# Altium PCB SupplyBoard.PcbDoc
Units mm, origin at the board's own origin, x right, y up, seen from the top; angles counter-clockwise.
Board outline 44.31 x 44.31 mm, 2 copper layers (Top Layer, Bottom Layer), stack 1.571 mm thick; 38 components, 16 nets, 142 pads, 59 vias.
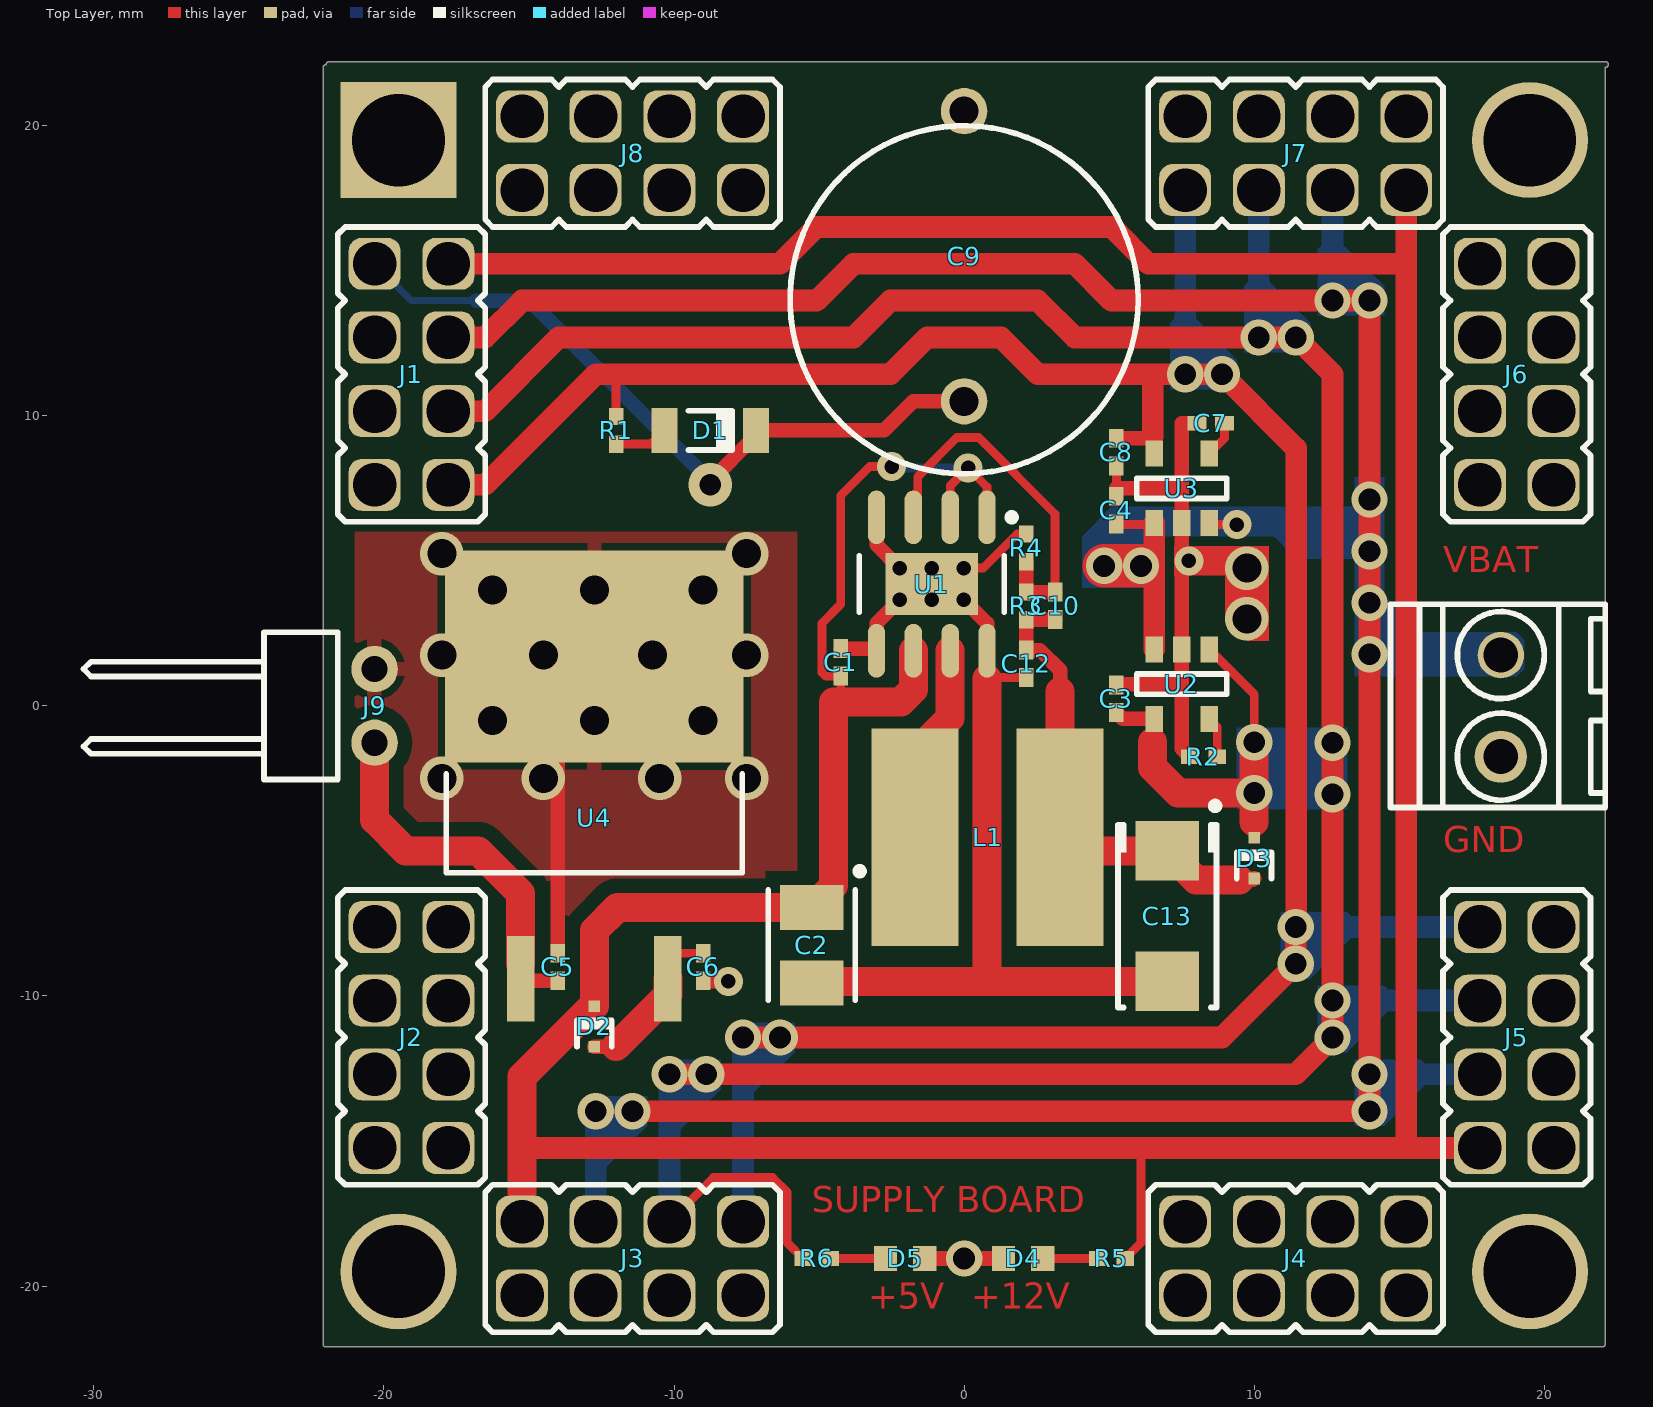
[diagram p0: Top Layer view]
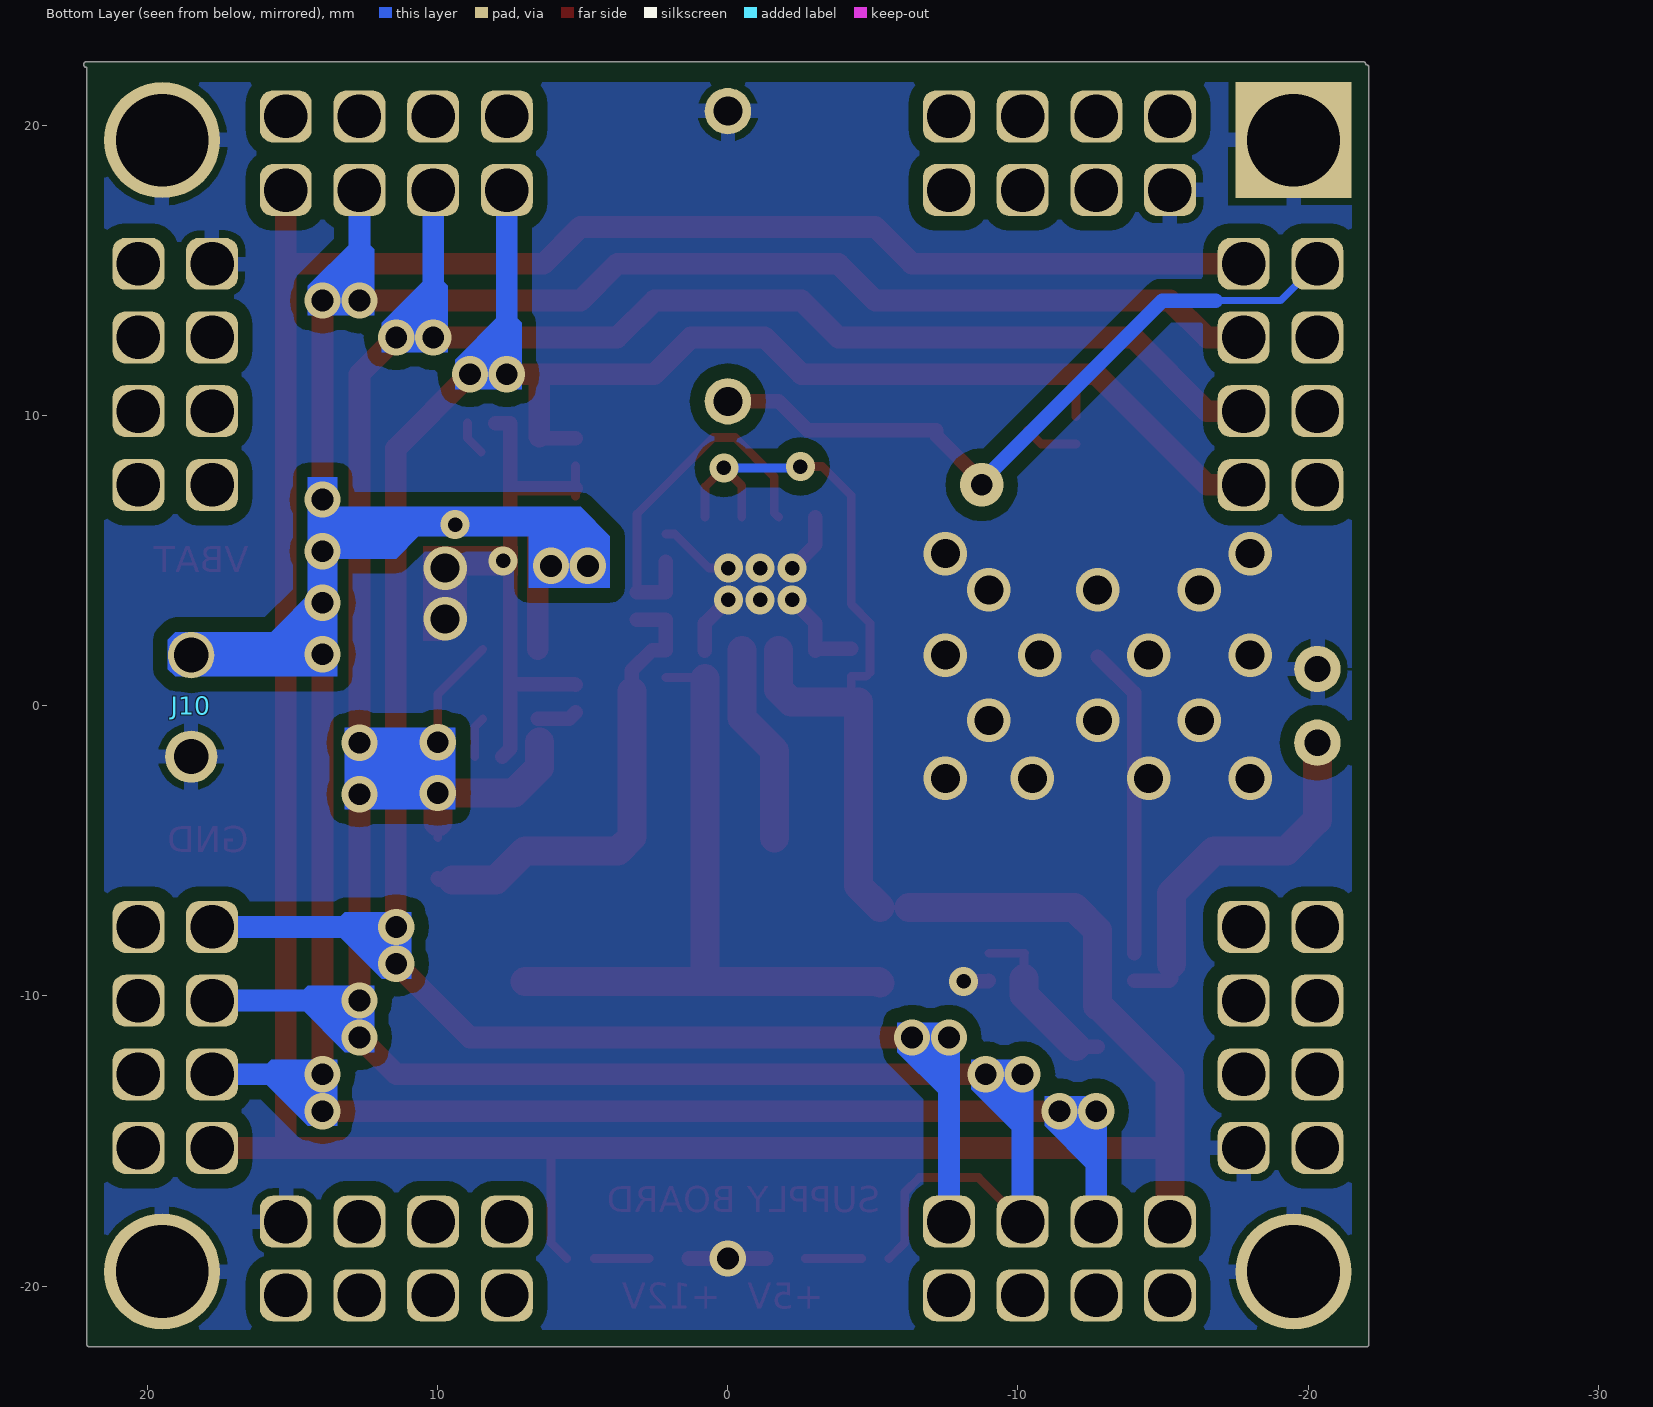
[diagram p1: Bottom Layer view, seen from below]

## Layer stack, top to bottom
Top Solder: solder mask 0.0102, Solder Resist, Dk 3.5
Top Layer: signal copper 0.0356
Dielectric 1: dielectric 1.5, FR-4, Dk 4.8
Bottom Layer: signal copper 0.0356
Bottom Solder: solder mask 0.0102, Solder Resist, Dk 3.5

## Board outline
-22.1,-22 -22.1,22 cw(c-22,22) -21.991,22.1 cw(c-21.891,22.109) -21.891,22.209 22.109,22.209 cw(c22.109,22.109) 22.209,22.109 cw(c22.109,22.109) 22.109,22.008 22.1,22.008 cw(c22,22) 22.1,22 22.1,-22 cw(c22,-22) 22,-22.1 -22,-22.1 cw(c-22,-22)

## Design rules (kind name [scope] priority, off if disabled: settings)
Clearance Clearance_Track(GND)_Polygon(GND) [IsTrack and InNet('GND') vs InPolygon and InNet('GND')] p1: gap=0
Clearance Clearance_Track(VCC)_Polygon(VCC) [IsTrack and InNet('VCC') vs InPolygon and InNet('VCC')] p2: gap=0
Clearance Clearance_Track(VBAT)_Polygon(VBAT) [IsTrack and InNet('VBAT') vs InPolygon and InNet('VBAT')] p3: gap=0
Clearance Clearance_Polygon(VCC) [InPolygon and InNet('VCC')] p4: gap=1
Clearance Clearance_Polygon(GND) [InPolygon and InNet('GND')] p5: gap=0.5
Clearance [All] p6: gap=0.25
HoleSize [All] p1: absolutevalues=TRUE maxlimit=4 minlimit=0.3 maxpercent=80.000 minpercent=20.000
PolygonConnect PolygonConnect_Via(VCC) [InNet('VCC')] p1: connectstyle=Direct reliefconductorwidth=0.254 reliefentries=4 polygonreliefangle="90 Angle" airgapwidth=0.254
PolygonConnect PolygonConnect_Via(GND) [InNet('GND') vs IsVia] p2: connectstyle=Direct reliefconductorwidth=0.254 reliefentries=4 polygonreliefangle="90 Angle" airgapwidth=0.254
PolygonConnect [All] p3: connectstyle=Relief reliefconductorwidth=0.5 reliefentries=4 polygonreliefangle="90 Angle" airgapwidth=0.25
RoutingVias [All] p1: holewidth=0.5 width=1 viastyle="Through Hole" minholewidth=0.5 minwidth=1 maxholewidth=1.5 maxwidth=2
ShortCircuit ShortCircuit_Text_Polygon(GND) [InPolygon and InNet('GND') vs IsText] p1: allowed=TRUE
ShortCircuit [All] p2: allowed=FALSE
SilkToSilkClearance [All] p1: silktosilkclearance=0
SolderMaskExpansion [All] p1: expansion=0.102
Width [All] p1: maxlimit=2 minlimit=0.25 preferedwidth=0.3
26 further rules are at their usual default settings.

## Components (designator, comment, footprint, x,y, rotation, side; value= is the part's Value field where it differs from the comment)
C1 "0.1/25" CAP0402 -4.25,1.5 r270 top
C2 "100.0/16" SMB -5.25,-8.25 r270 top
C3 "0.1/25" CAP0402 5.25,0.25 r270 top
C4 "0.1/25" CAP0402 5.25,6.75 r270 top
C5 "0.1/25" CAP0402 -14,-9 r270 top
C6 "0.1/25" CAP0402 -9,-9 r90 top
C7 "0.1/25" CAP0402 8.5,9.75 r0 top
C8 "0.1/25" CAP0402 5.25,8.75 r90 top
C9 "0.1/5.5" EDLC1205H 0,14 r0 top
C10 "4.7p/25" CAP0402 3.135,3.45 r270 top
C12 "0.1/25" CAP0402 2.135,1.45 r90 top
C13 "220.0/6.3" SMC 7,-7.25 r270 top
D1 "LL4148" SOD80 -8.75,9.5 r180 top
D2 "PMEG2010EJ" SOD523 -12.75,-11.05 r270 top
D3 "PMEG2010EJ" SOD523 10,-5.25 r270 top
D4 "L-C191" LED0603 2.032,-19.05 r0 top
D5 "L-C191" LED0603 -2.032,-19.05 r180 top
J1 "LEFT" PBDM-8 -19.05,11.43 r270 top
J2 "LEFT" PBDM-8 -19.05,-11.43 r270 top
J3 "BOTTOM" PBDM-8 -11.43,-19.05 r0 top
J4 "BOTTOM" PBDM-8 11.43,-19.05 r0 top
J5 "RIGHT" PBDM-8 19.05,-11.43 r90 top
J6 "RIGHT" PBDM-8 19.05,11.43 r90 top
J7 "TOP" PBDM-8 11.43,19.05 r180 top
J8 "TOP" PBDM-8 -11.43,19.05 r180 top
J9 "PLS-2R" PLS-2R -20.32,0 r270 top
J10 "DG-381-3.5(2)" DG-381-3.5(2) 18.5,0 r270 bottom
L1 "10u" SND0705 -1.69,-4.525 r90 top
R1 "5.1k" RES0402 -12,9.5 r90 top
R2 "2k" RES0402 8.25,-1.75 r0 top
R3 "9.1k" RES0402 2.135,3.45 r270 top
R4 "2k" RES0402 2.135,5.45 r270 top
R5 "1k" RES0402 5.08,-19.05 r0 top
R6 "1k" RES0402 -5.08,-19.05 r180 top
U1 "ST1S10" PowerSO8 -1.115,4.2 r270 top
U2 "MCP73812T" SOT23-5 7.5,0.75 r270 top
U3 "LP2985-3.3" SOT23-5 7.5,7.5 r90 top
U4 "7812D2T" D2PAK-3 -12.75,-2.75 r90 top

## Footprints (in the part's own frame and the unit in brackets; to place one, negate y for a bottom-side part, rotate by r counter-clockwise, add the part's x,y. Pads: shape width x height; smd on the part's side, far side on the other; paste and mask are expansions set on the pad)
CAP0402 [mm]
  rect 0.65x0.5 smd: 1(-0.475,0) 2(0.475,0)
  body extent -0.55,-0.3 0.55,0.3, height 0.5
D2PAK-3 [mm]
  rect 2.95x0.95 smd: 1(-6.65,2.54) 3(-6.65,-2.54)
  rect 7.3x10.3 smd: 2(4.45,0)
  silkscreen extent -3,-5.1 0.4,5.1, body extent -7.7,-5.25 7.65,5.25, height 4.9
DG-381-3.5(2) [mm] "2-pin connector with screws, pitch 3.5 mm"
  round 1.6 hole 1.2: 1(-1.75,0)
  round 1.8 hole 1.2: 2(1.75,0)
  body extent -3.5,-3.6 4,3.8, height 8.6
EDLC1205H [mm]
  round 1.6 hole 1: 1(0,6.5) 2(0,-3.5)
  silkscreen extent -6,-6 6,6, body extent -6,-6 6,6.4, height 6.6
LED0603 [mm]
  rect 0.8x0.85 smd: 1(-0.675,0) 2(0.675,0)
  body extent -0.8,-0.4 0.8,0.4, height 0.59
PBDM-8 [mm] "5-pin interboard connector, pitch 2.54 mm"
  rrect50% 1.79x1.79 hole 1.5: 1(-3.81,-1.27) 2(-3.81,1.27) 3(-1.27,-1.27) 4(-1.27,1.27) 5(1.27,-1.27) 6(1.27,1.27) 7(3.81,-1.27) 8(3.81,1.27)
  silkscreen extent -5.08,-2.54 5.08,2.54, body extent -5.08,-2.54 5.08,2.54, height 3
PLS-2R [mm] "2-pin angle interboard connector, pitch 2.54 mm"
  round 1.6 hole 0.9: 1(-1.27,0) 2(1.27,0)
  silkscreen extent -2.54,-10.03 2.54,-1.27, body extent -2.54,-9.91 2.54,0.31, height 2.44
PowerSO8 [mm] "Plastic SOIC, 8-pin with exposed pad"
  oval 1.85x0.6 smd: 1(-2.3,1.905) 2(-2.3,0.635) 3(-2.3,-0.635) 4(-2.3,-1.905) 5(2.3,-1.905) 6(2.3,-0.635) 7(2.3,0.635) 8(2.3,1.905)
  rect 2.15x3.2 smd: 9(0,0)
  silkscreen extent -2.42,-2.5 0.97,2.88, body extent -3,-2.54 3,2.54, height 1.7
RES0402 [mm]
  rect 0.6x0.5 smd: 1(-0.475,0) 2(0.475,0)
  body extent -0.53,-0.28 0.53,0.28, height 0.35
SMB [mm] "Surface mount package, size B"
  rect 1.55x2.2 smd: 1(1.3,0) 2(-1.3,0)
  silkscreen extent -2.67,-1.5 1.9,1.78, body extent -1.75,-1.4 1.75,1.4, height 2.1
SMC [mm] "Surface mount package, size C"
  rect 2.05x2.2 smd: 1(2.25,0) 2(-2.25,0)
  silkscreen extent -3.92,-1.7 3.15,1.78, body extent -3,-1.6 3,1.6, height 2.8
SND0705 [mm] "SMD Inductor 7.8x7x5 mm"
  rect 7.5x3 smd: 1(0,0) 2(0,-5)
  body extent -3.5,-6.4 3.5,1.4, height 5
SOD80 [mm]
  rect 0.9x1.55 smd: 1(-1.575,0) 2(1.575,0)
  silkscreen extent -0.75,-0.67 0.75,0.68, body extent -1.85,-0.8 1.85,0.8, height 1.61
SOD523 [mm]
  rect 0.4x0.4 smd: 1(-0.7,0) 2(0.7,0)
  silkscreen extent -0.2,-0.6 0.7,0.6, body extent -0.7,-0.6 0.7,0.6, height 0.6
SOT23-5 [mm] "SOT23, 5-Leads, Body 2,90x2,70mm, Pitch 0,95mm, IPC High Density"
  rect 0.9x0.6 smd: 1(-1.2,0.95) 2(-1.2,0) 3(-1.2,-0.95) 4(1.2,-0.95) 5(1.2,0.95)
  silkscreen extent -0.35,-1.55 0.35,1.55, body extent -1.43,-1.5 1.41,1.5, height 1.1

## Part data
C1 C3 C4 C5 C6 C7 C8 C10 C12: library part CAP0402, "Ceramic chip capacitor 0402"
C2: library part TAJB, "Standard tantalum SMT capacitor, size B"
C9: library part EDLC1205H, "Electric double layer capacitor"
C13: library part TAJC, "Standard tantalum SMT capacitor, size C"
D1: "Small Signal Diode"
D2 D3: "1 A very low VF MEGA Schottky barrier rectifiers"
D4 D5: "SMD LED, size 0603"
J1 J2 J3 J4 J5 J6 J7 J8: library part PBDM-8, "2x4-pin header, pitch 2.54 mm"
J9: "2-pin angle header, pitch 2.54 mm"
J10: "2-pin connector with screws, pitch 3.5 mm"
L1: library part SND0705, "Power inductor"
R1 R2 R3 R4 R5 R6: library part RES0402, "Ceramic chip resistor"
U1: "DC-DC buck converter"
U2: "Li-Ion/Li-Po battery charge management controller"
U3: "Micropower 150 mA Low-Noise Ultra Low-Dropout Regulator"
U4: "1.0 A Positive Voltage Regulator"

## Free pads (board coordinates)
  round 4 hole 3.2: 0(-19.5,-19.5) 0(19.5,-19.5) 0(19.5,19.5)
  rect 4x4 hole 3.2: 0(-19.5,19.5)

## Via types
v1: diameter 1.25, hole 0.75, Top Layer to Bottom Layer, 29 vias
v2: diameter 1.5, hole 1, Top Layer to Bottom Layer, 18 vias
v3: diameter 1, hole 0.5, Top Layer to Bottom Layer, 11 vias
v4: diameter 1.5, hole 0.75, Top Layer to Bottom Layer, 1 vias

## Nets (pads, with @x,y where several pads share a name; then routed paths per layer and width w, separated by ;. In a path a pad name is that pad's centre, name@x,y a point inside that pad or via, vN(x,y) a via of type N, cw(c..) or ccw(c..) an arc to the next point about the centre after c; other vN are vias at no path point)
+5V: C3.2 D3.1 J1.6 J3.6 J5.6 J7.6 R6.2 U2.1 U2.4 | length 115.2
  Top Layer w0.3: J3.6 -8.636,-16.256 -6.604,-16.256 -6.096,-16.764 -6.096,-18.509 R6.2 ; U2.1 10,0.4 v1@10,-1.364 ; D3.1 10,-4
  Top Layer w0.5: C3.2 5.475,-0.45 U2.4
  Top Layer w0.75: J1.6 -16.51,10.16 -13.97,12.7 -3.81,12.7 -2.54,13.97 2.54,13.97 3.81,12.7 v1(10.16,12.7) v1(11.43,12.7) 12.7,11.43 v1(12.7,-1.27) v1(12.7,-3.048) v1(12.7,-10.16) v1(12.7,-11.43) 11.43,-12.7 v1(-8.89,-12.7) v1(-10.16,-12.7)
  Top Layer w1: 6.5,-1.25 6.5,-2.125 7.375,-3 v1@9.886,-3 ; 10,-4 v1(10,-3) v1@10,-1.364
  Bottom Layer w0.75: J3.6 v1(-10.16,-12.7) ; v1(10.16,12.7) J7.6 ; v1(12.7,-10.16) J5.6
  other v1: 10,-1.25
+12V: C1.2 C2.2 D2.1 J1.2 J3.2 J5.2 J7.2 R5.2 U1.1 U1.2 U1.6 | length 150.5
  Top Layer w0.3: -4.5,0.14 -4.25,0.39 C1.2 -4.775,1.025 -4.9,1.15 -4.9,2.85 -4.25,3.5 -4.25,7.25 -3.25,8.25 v3(-2.5,8.25) ; U1.2 -0.48,7.585 v3(0.135,8.2) 0.79,7.545 U1.1 ; R5.2 6.096,-18.509 6.096,-15.24
  Top Layer w0.75: J1.2 -6.35,15.24 -5.08,16.51 5.08,16.51 6.35,15.24 15.24,15.24 ; -15.24,-15.24 6.096,-15.24 15.24,-15.24 ; J7.2 15.24,15.24 ; J5.2 15.24,-15.24 ; 15.24,-15.24 15.24,15.24
  Top Layer w1: J3.2 -15.24,-15.24 -15.24,-12.779 -12.811,-10.35 D2.1 -12.75,-7.75 -11.95,-6.95 C2.2@-6.25,-6.95 ; C2.2 -4.5,-6.2 -4.5,0.14 -2.175,0.14 -1.75,0.565 U1.6
  Bottom Layer w0.3: v3(-2.5,8.25) -2.45,8.2 v3(0.135,8.2)
+15V: C5.2 J9.2 U4.1 | length 12.5
  Top Layer w0.5: U4.1 -15.215,-9.475 C5.2
  Top Layer w1: J9.2 -20.32,-3.93 -19.25,-5 -16.75,-5 -15.29,-6.46 U4.1@-15.29,-8.9
GND: C1.1 C2.1 C3.1 C4.1 C5.1 C6.1 C7.1 C8.1 C9.1 C12.1 C13.1 D4.1 D5.1 J2.8 J4.8 J6.8 J8.8 J9.1 J10.2 pad.0 R2.1 R4.1 U1.4 U1.5 U1.8 U1.9 U2.2 U3.2 U4.2 | length 66.5
  Top Layer w0.3: v3(-0.015,4.75) 0.655,4.75 1.83,5.925 R4.1 ; 0.79,0.95 0.815,0.975 C12.1 ; C4.1 5.25,7.5 C8.1
  Top Layer w0.5: C5.1 -14,0.45 U4.2 ; C6.1 -8.975,-9.5 v3(-8.125,-9.5) ; C1.1 -3.095,1.975 U1.5 -3.02,2.845 v3(-2.215,3.65) ; U1.4 -3.02,5.555 v3(-2.215,4.75) ; D5.1@-1.325,-19.05 v1(0,-19.05) D4.1 ; v3(-0.015,3.65) 0.79,2.845 U1.8 ; C3.1 5.275,0.75 7.5,0.75 ; C4.1@5.25,7.5 7.5,7.5 ; R2.1 7.5,-1.475 7.5,0.75 ; C7.1 7.5,9.75 7.5,7.5 ; 8.5,5 8.75,5 ; 7.5,0.75 U2.2 U3.2 7.5,7.5
  Top Layer w1: C2.1 -5.2,-9.5 0.79,-9.5 ; 0.79,0.95 0.79,-9.5 ; C13.1 0.79,-9.5
  other v2: -18,-2.5 -14.5,-2.5 -10.5,-2.5 -7.5,-2.5 -16.25,-0.5 -12.75,-0.5 -9,-0.5 -18,1.75 -14.5,1.75 -10.75,1.75 -7.5,1.75 9.75,3 -16.25,4 -12.75,4 -9,4 9.75,4.75 -18,5.25 -7.5,5.25
  other v3: -1.115,3.65 -1.115,4.75 7.75,5
NetC6_2: C6.2 D2.2 U4.3 | length 5.9
  Top Layer w0.3: U4.3@-10.225,-8.525 C6.2 ; U4.3 U4.3@-10.21,-8.54
  Top Layer w0.5: D2.2 -12,-11.75
  Top Layer w1: -12,-11.75 -10.21,-9.96 U4.3
NetC7_2: C7.2 U3.4 | length 1.2
  Top Layer w0.3: U3.4@8.5,8.75 8.975,9.225 C7.2
NetC10_1: C10.1 R3.1 R4.2 U1.3 | length 12.6
  Top Layer w0.3: U1.3 -1.6,6.65 -1.6,7.9 -0.25,9.25 0.5,9.25 3.135,6.615 C10.1
  Top Layer w0.5: R4.2 R3.1 C10.1
NetC10_2: C10.2 C12.2 C13.2 D3.2 L1.2 R3.2 | length 16.6
  Top Layer w0.5: C10.2 R3.2 C12.2 2.61,1.925 3.31,1.225 3.31,0.5 ; 9.5,-6 9.95,-6 D3.2
  Top Layer w1: 3.31,0.5 L1.2 3.785,-5 C13.2 8,-6 9.5,-6
NetD1_2: D1.2 R1.1 | length 1.9
  Top Layer w0.3: R1.1 -10.8,9.025 D1.2
NetD4_2: D4.2 R5.1 | length 1.9
  Top Layer w0.3: D4.2 R5.1
NetD5_2: D5.2 R6.1 | length 1.9
  Top Layer w0.3: R6.1 D5.2 D5.2@-2.675,-19.05
NetL1_1: L1.1 U1.7 | length 6.9
  Top Layer w1: L1.1@-1.615,-4.55 -1.615,-1.55 -0.48,-0.415 U1.7
NetR2_2: R2.2 U2.5 | length 1.4
  Top Layer w0.3: U2.5 8.725,-0.725 R2.2
VBAT: C4.2 J1.4 J3.4 J5.4 J7.4 J10.1 U2.3 U3.1 U3.3 | length 106
  Top Layer w0.3: C4.2@5.225,6.25 U3.1@6.5,6.25 ; U3.3 8.5,6.25 v3(9.4,6.25)
  Top Layer w0.75: J1.4 -16.51,12.7 -15.24,13.97 -5.08,13.97 -3.81,15.24 3.81,15.24 5.08,13.97 v1(12.7,13.97) v1(13.97,13.97) v1(13.97,-12.7) v1(13.97,-13.97) v1(-11.43,-13.97) ; U2.3 U3.1
  Top Layer w1.5: v1(4.826,4.826) v1(6.096,4.826)
  Bottom Layer w0.75: J3.4 v1(-12.7,-13.97) ; v1(12.7,13.97) J7.4 ; v1(13.97,-12.7) J5.4
  other v1: 13.97,1.778 13.97,3.556 13.97,5.334 13.97,7.112
VBKUP: C9.2 D1.1 J1.1 | length 24.9
  Top Layer w0.5: v4(-8.75,7.625) -8.75,7.75 -7.175,9.325 D1.1 -2.75,9.5 -1.75,10.5 C9.2
  Bottom Layer w0.25: J1.1 -19.05,13.97 -16.815,13.97
  Bottom Layer w0.5: -16.815,13.97 -14.97,13.97 -8.75,7.75 v4(-8.75,7.625)
VCC: C8.2 J1.8 J3.8 J5.8 J7.8 R1.2 U3.5 | length 94.8
  Top Layer w0.3: R1.2 -12,11.43
  Top Layer w0.5: C8.2 6.55,9.225 6.5,9.275
  Top Layer w0.75: J1.8 -16.51,7.62 -12.7,11.43 -12,11.43 -2.54,11.43 -1.27,12.7 1.27,12.7 2.54,11.43 6.5,11.43 ; v1(-7.62,-11.43) v1(-6.35,-11.43) 8.89,-11.43 v1(11.43,-8.89) v1(11.43,-7.62) 11.45,-7.6 11.45,8.87 v1(8.89,11.43) v1(7.62,11.43) 6.5,11.43 ; 6.5,9.275 6.5,11.43
  Bottom Layer w0.75: J3.8 v1(-7.62,-11.43) ; v1(7.62,11.43) J7.8 ; v1(11.43,-7.62) J5.8
pads on no net: J1.3 J1.5 J1.7 J2.1 J2.2 J2.3 J2.4 J2.5 J2.6 J2.7 J3.1 J3.3 J3.5 J3.7 J4.1 J4.2 J4.3 J4.4 J4.5 J4.6 J4.7 J5.1 J5.3 J5.5 J5.7 J6.1 J6.2 J6.3 J6.4 J6.5 J6.6 J6.7 J7.1 J7.3 J7.5 J7.7 J8.1 J8.2 J8.3 J8.4 J8.5 J8.6 J8.7

## Polygon pours and split planes (outlines as drawn)
GND on Top Layer "Top-GND" (solid, remove dead copper, pour order 4): -5.75,6 -5.75,-7.75 -20.538,-7.75 -21,-7.538 -21,6
GND on Bottom Layer "Bottom-GND" (solid, remove dead copper, pour order 6): -21.5,21.5 21.5,21.5 21.5,-21.5 -21.5,-21.5

## Other copper
Top Layer:
  region net GND: 7.25,5.5 10.5,5.5 10.5,2.25 9.75,2.25 9,3 9,4.5 7.25,4.5
  text "VBAT" at 16.51,4.318 h1.52
  text "GND" at 16.51,-5.334 h1.52
  text "SUPPLY BOARD" at -5.25,-17.75 h1.52
  text "+5V" at -3.302,-21.082 h1.52
  text "+12V" at 0.254,-21.082 h1.52
Bottom Layer:
  region net VBAT: 13.462,1.016 19.05,1.016 19.304,1.27 19.304,2.286 19.05,2.54 15.748,2.54 14.224,4.064 13.462,4.064
  region net VBAT: 14.478,6.858 14.478,5.08 11.43,5.08 10.668,5.842 6.858,5.842 6.858,4.064 4.064,4.064 4.064,5.842 5.08,6.858
  region net VBAT: 14.478,7.874 14.478,1.016 13.462,1.016 13.462,7.874
  region net +5V: 13.208,-0.762 13.208,-3.556 9.398,-3.556 9.398,-0.762
  region net VBAT: -12.954,-13.462 -10.922,-13.462 -10.922,-14.478 -12.446,-16.002 -12.954,-16.002
  region net +5V: -10.414,-12.192 -8.382,-12.192 -8.382,-13.208 -9.906,-14.732 -10.414,-14.732
  region net VCC: -7.874,-10.922 -5.842,-10.922 -5.842,-11.938 -7.366,-13.462 -7.874,-13.462
  region net VBAT: 13.462,-12.192 13.462,-14.478 14.478,-14.478 16.002,-12.954 16.002,-12.446 15.748,-12.192
  region net +5V: 12.192,-9.652 12.192,-11.938 13.208,-11.938 14.732,-10.414 14.732,-9.906 14.478,-9.652
  region net VCC: 10.922,-7.112 10.922,-9.398 11.938,-9.398 13.462,-7.874 13.462,-7.366 13.208,-7.112
  region net VBAT: 12.192,13.462 14.478,13.462 14.478,14.478 12.954,16.002 12.446,16.002 12.192,15.748
  region net +5V: 9.652,12.192 11.938,12.192 11.938,13.208 10.414,14.732 9.906,14.732 9.652,14.478
  region net VCC: 7.112,10.922 9.398,10.922 9.398,11.938 7.874,13.462 7.366,13.462 7.112,13.208

## Silkscreen, mask and mechanical layers (free items; w line width, h text height)
Board:
  lines w0.2: -22,22 -22,-22 22,-22 22,22 ; -21.891,22.109 22.109,22.109